# Altium PCB landslide_gateway.PcbDoc
Units mm, origin at the board's own origin, x right, y up, seen from the top; angles counter-clockwise.
Board outline 100 x 100 mm, 2 copper layers (Top Layer, Bottom Layer), stack 1.571 mm thick; 82 components, 60 nets, 314 pads, 222 vias.
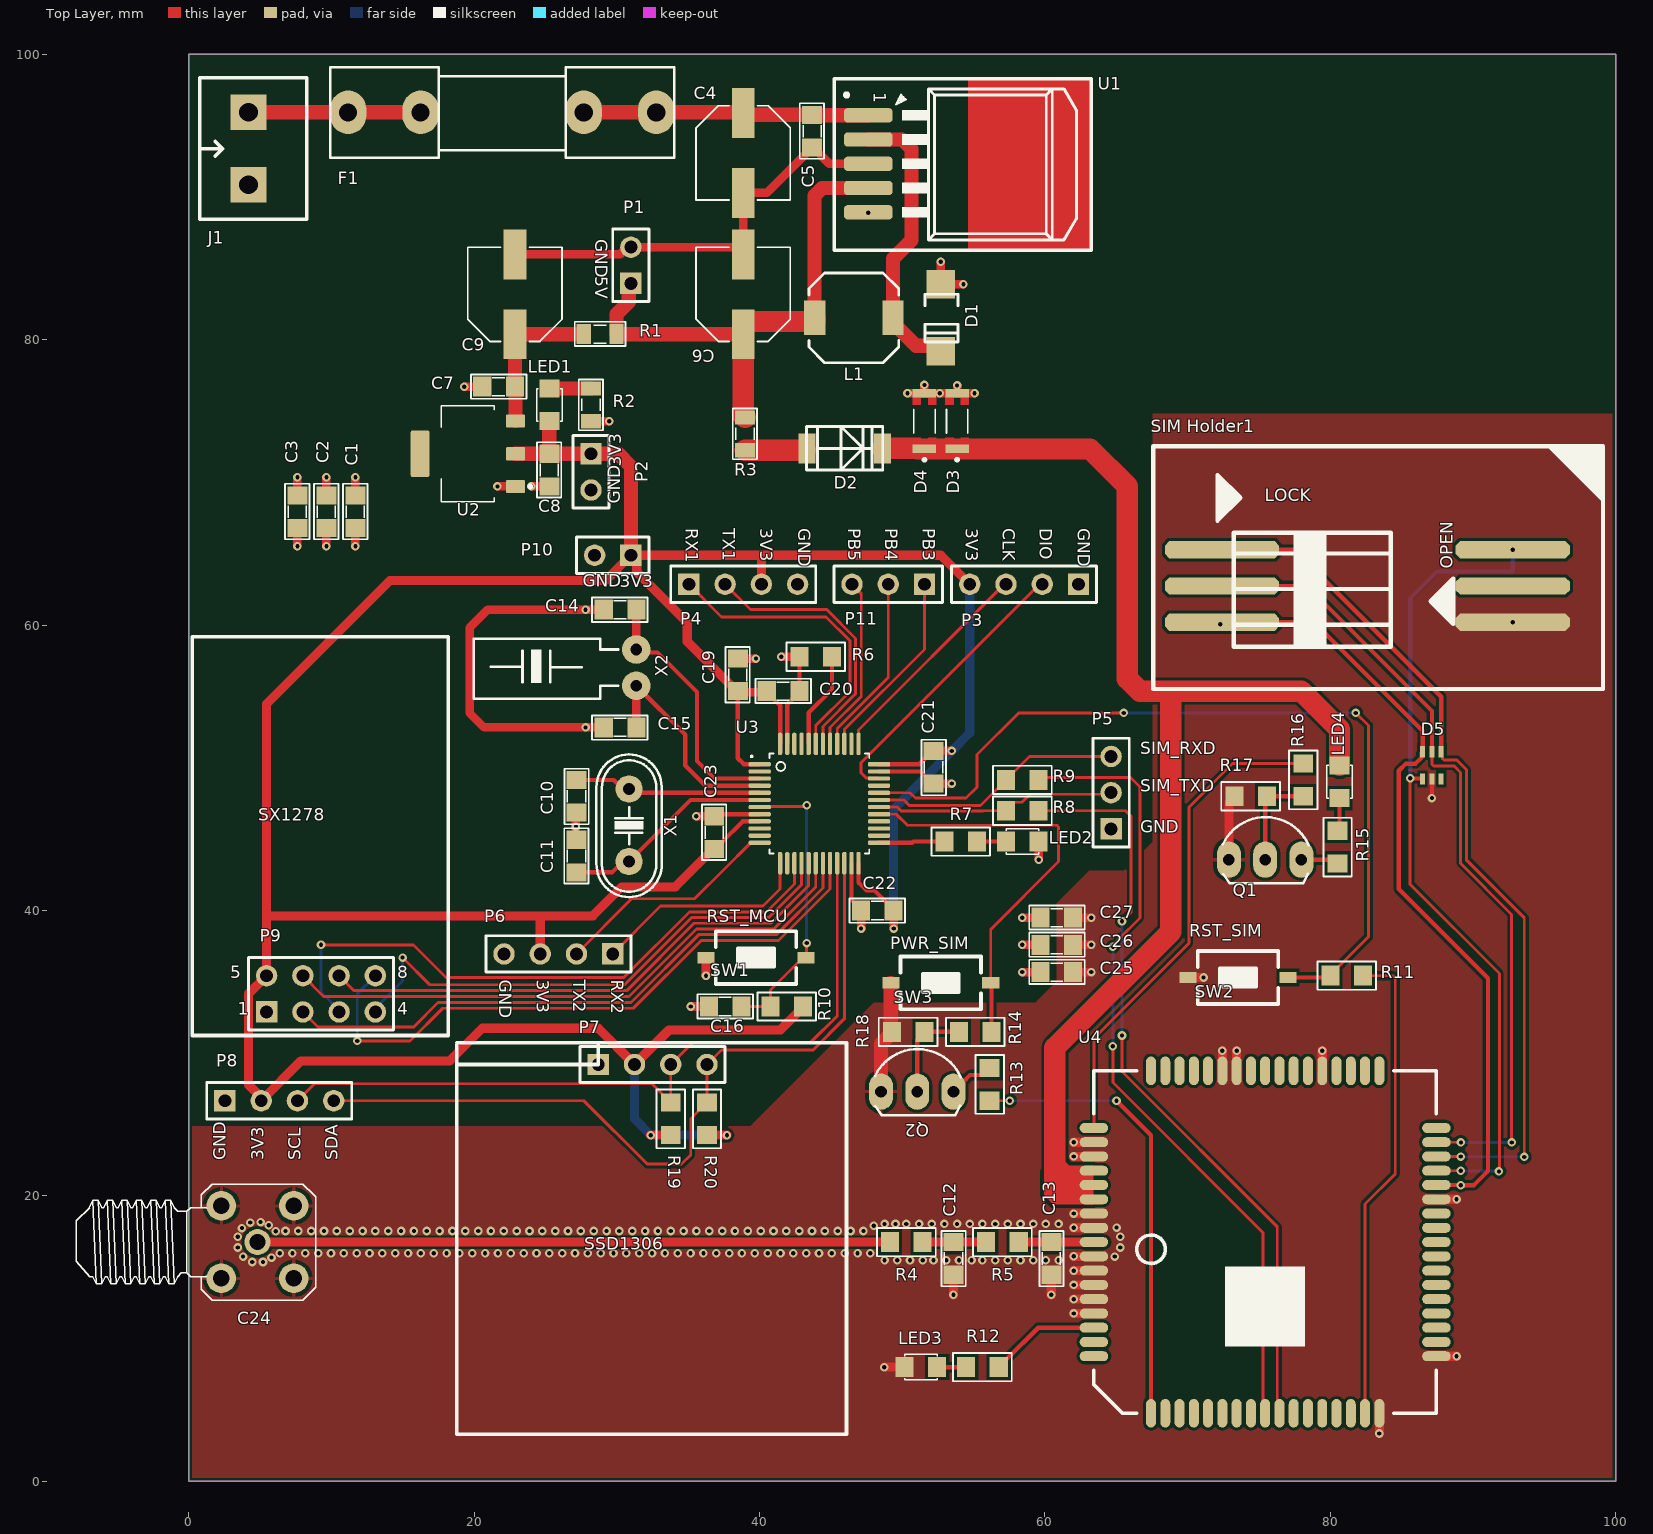
[diagram p0: Top Layer view]
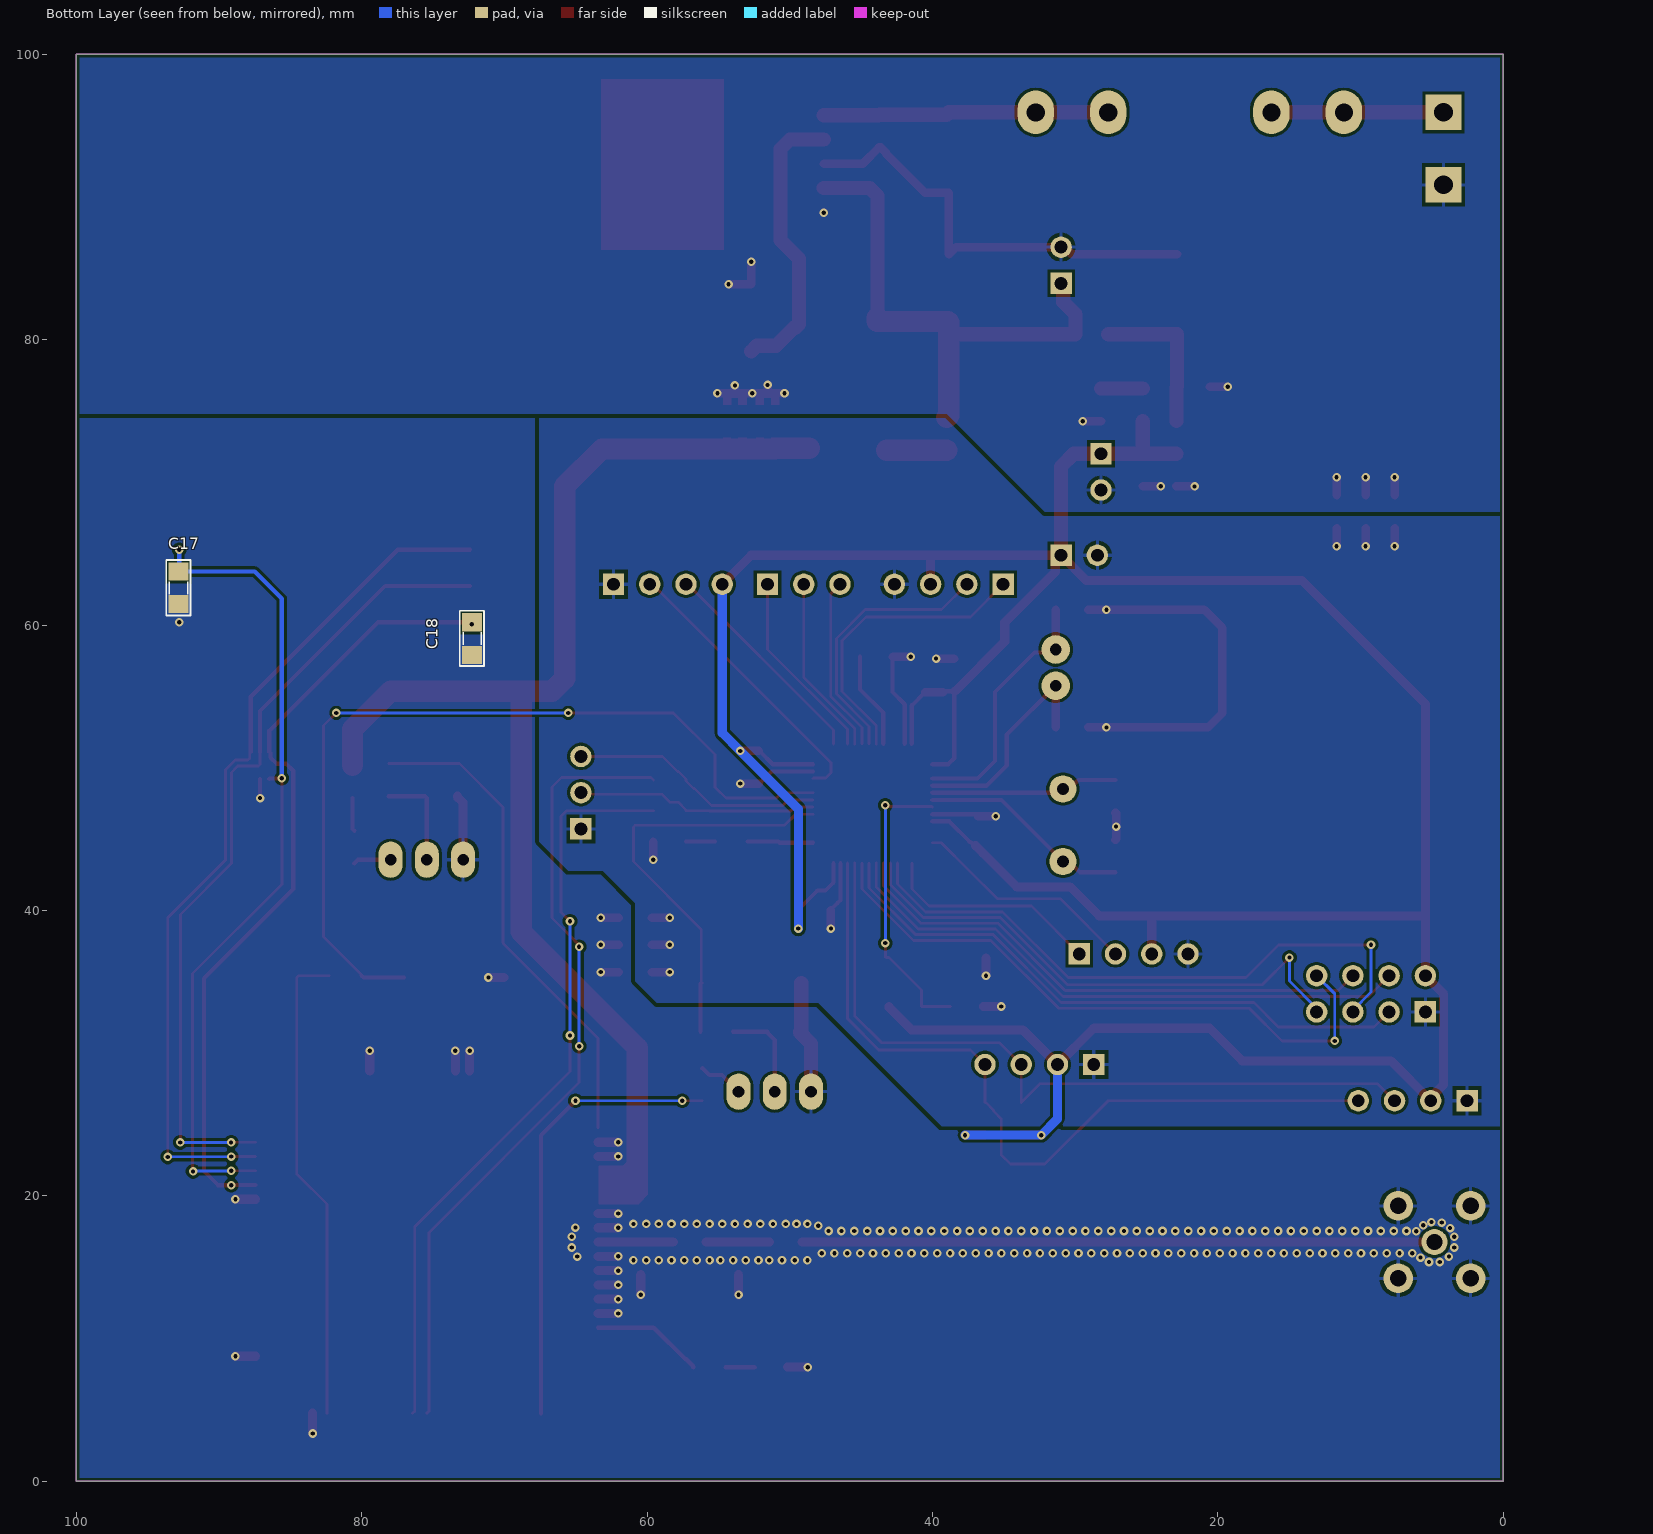
[diagram p1: Bottom Layer view, seen from below]

## Layer stack, top to bottom
Top Solder: solder mask 0.0102, Solder Resist, Dk 3.5
Top Layer: signal copper 0.0356
Dielectric 1: dielectric 1.5, FR-4, Dk 4.8
Bottom Layer: signal copper 0.0356
Bottom Solder: solder mask 0.0102, Solder Resist, Dk 3.5

## Board outline
0,0 0,100 100,100 100,0

## Design rules (kind name [scope] priority, off if disabled: settings)
AssemblyTestPointUsage [All] p1 off:
AssemblyTestpoint [All] p1 off: testpointundercomponent=TRUE minsize=1.016 maxsize=2.54 preferedsize=1.524 minholesize=0 maxholesize=1.016 preferedholesize=0.813 testpointgrid=0.025 usegrid=TRUE gridtolerance=0 allowsidetop=TRUE allowsidebottom=TRUE
Clearance RF [InNetClass('50R_ANT')] p1: gap=0.2 ignorepadtopadclearanceinfootprint=FALSE except(0: Arc-Hole Track-Hole SMDPad-Hole THPad-Hole Via-Hole Fill-Hole Poly-Hole Region-Hole Text-Hole; 0.13: Arc-Via Arc-Fill Arc-Poly Arc-Region Track-Via Track-Fill Track-Poly Track-Region)
Clearance [All] p2: gap=0.2 ignorepadtopadclearanceinfootprint=FALSE except(0: Arc-Hole Track-Hole SMDPad-Hole THPad-Hole Via-Hole Fill-Hole Poly-Hole Region-Hole Text-Hole; 0.3: Fill-Fill Fill-Poly Fill-Region Poly-Poly Poly-Region Region-Region)
FabricationTestPointUsage [All] p1 off: valid=0 allowmultiple=FALSE
FabricationTestpoint [All] p1 off: side=3 testpointundercomponent=TRUE minsize=1.016 maxsize=2.54 preferedsize=1.524 minholesize=0 maxholesize=1.016 preferedholesize=0.813 testpointgrid=0.025 allowsidetop=TRUE allowsidebottom=TRUE usegrid=TRUE gridtolerance=0
MinimumSolderMaskSliver [All] p1: minsoldermaskwidth=0
PolygonConnect [All] p1: thpad.connectstyle=Relief thpad.reliefconductorwidth=0.254 thpad.reliefentries=4 thpad.polygonreliefangle="90 Angle" thpad.airgapwidth=0.254 smdpad.connectstyle=Direct smdpad.reliefconductorwidth=0.254 smdpad.reliefentries=4 smdpad.polygonreliefangle="90 Angle" smdpad.airgapwidth=0.254 via.connectstyle=Direct via.reliefconductorwidth=0.254 via.reliefentries=4 via.polygonreliefangle="90 Angle" via.airgapwidth=0.254
RoutingVias [All] p1: holewidth=0.3 width=0.6 viastyle="Through Hole" minholewidth=0.3 minwidth=0.6 maxholewidth=0.3 maxwidth=0.6
SilkToSilkClearance [All] p1: silktosilkclearance=0
SilkToSolderMaskClearance [IsPad] p1: minsilkscreentomaskgap=0 clearancetoexposedcopper=TRUE
SolderMaskExpansion [All] p1: expansion=0.102 istentingtop=FALSE
Width RF_width [InNetClass('50R_ANT')] p1: maxlimit=0.642 minlimit=0.642 preferedwidth=0.642 impedanceprofiledriven=TRUE impedanceprofileid={82C3FFAF-1901-45A9-A1B3-9F420BA7F2EB} impedanceprofilevalue=50.000000 minimp=50.000000 maximp=50.000000 favimp=50.000000
Width [All] p2: maxlimit=3 minlimit=0.2 preferedwidth=0.3
23 further rules are at their usual default settings.

## Classes and differential pairs
net class RF: GSM_ANT NetC12_2 NetC13_2
net class POWER: +3V3 +5 GND GND_MCU GND_SIM NetC7_1 NetD1_2 NetF1_1 VGSM Vin
net class 50R_ANT: GSM_ANT NetC12_2 NetC13_2
component class power_gateway: C1 C2 C3 C4 C5 C6 C7 C8 C9 D1 D2 D3 D4 F1 J1 L1 LED1 P1 P2 R1 R2 R3 U1 U2
component class mcu_gateway: C10 C11 C12 C13 C14 C15 C16 C17 C18 C19 C20 C21 C22 C23 C24 C25 C26 C27 D5 LED2 LED3 LED4 P3 P4 P5 P6 P7 P8 P9 P10 P11 Q1 Q2 R4 R5 R6 R7 R8 R9 R10 R11 R12 R13 R14 R15 R16 R17 R18 R19 R20 "SIM Holder1" SW1 SW2 SW3 U3 U4 X1 X2

## Components (designator, comment, footprint, x,y, rotation, side; value= is the part's Value field where it differs from the comment)
C1 "104" SM-0805 11.684,67.945 r270 top value=103
C2 "104" SM-0805 9.652,67.945 r270 top value=103
C3 "104" SM-0805 7.62,67.945 r270 top value=103
C4 "100uH/25V" CAP-ALU-SMD-6.3x7.7x2.2 38.862,93.091 r270 top
C5 "104" SM-0805 43.688,94.615 r270 top value=103
C6 "470uf/16V" CAP-ALU-SMD-6.3x7.7x2.2 38.862,83.185 r90 top
C7 "103" SM-0805 21.717,76.708 r180 top
C8 "103" SM-0805 25.273,70.866 r270 top
C9 "100uH/16V" CAP-ALU-SMD-6.3x7.7x2.2 22.86,83.185 r90 top
C10 "22pF" SM-0805 27.178,48.006 r90 top value=103
C11 "22pF" SM-0805 27.178,43.815 r270 top value=103
C12 "104" SM-0805 53.594,15.621 r90 top value=103
C13 "104" SM-0805 60.452,15.621 r90 top value=103
C14 "22pF" SM-0805 30.226,61.087 r0 top value=103
C15 "22pF" SM-0805 30.226,52.832 r0 top value=103
C16 "104" SM-0805 37.592,33.274 r180 top value=103
C17 "104" SM-0805 92.837,62.611 r270 bottom value=103
C18 "22pF" SM-0805 72.263,59.055 r270 bottom value=103
C19 "104" SM-0805 38.481,56.515 r270 top value=103
C20 "104" SM-0805 41.656,55.372 r180 top value=103
C21 "475" SM-0805 52.197,50.038 r90 top value=103
C22 "103" SM-0805 48.26,40.005 r0 top
C23 "105" SM-0805 36.83,45.466 r270 top value=103
C24 "210111003" SMA-RA 4.826,16.764 r270 top
C25 "104" SM-0805 60.833,35.687 r180 top value=103
C26 "104" SM-0805 60.833,37.592 r180 top value=103
C27 "104" SM-0805 60.833,39.497 r180 top value=103
D1 "1N5822" Diode_SS34 52.705,81.534 r270 top
D2 "" 1N4007_SMD 45.974,72.39 r0 top
D3 "TZM4V3" DIO_LL4148 53.848,74.295 r90 top
D4 "TZM4V3" DIO_LL4148 51.562,74.295 r90 top
D5 "SMF05C" SC70-6 87.122,50.165 r0 top
F1 "F2A" FUSE2 21.971,95.936 r0 top value=Fuse
J1 "KF2" KF2-5.08 4.191,93.396 r90 top
L1 "Inductor" inductor_smd 46.609,81.534 r180 top value=100uH
LED1 "LED" LED-0805-Green 25.273,74.295 r90 top value="LED 3 - 5 ly 2 Colour"
LED2 "LED" LED-0805-Green 57.277,44.831 r0 top value="LED 3 - 5 ly 2 Colour"
LED3 "LED" LED-0805-Green 52.451,8.001 r180 top value="LED 3 - 5 ly 2 Colour"
LED4 "LED" LED-0805-Green 80.645,50.165 r270 top value="LED 3 - 5 ly 2 Colour"
P1 "Header 2" HDR1X2 30.988,83.947 r90 top
P2 "Header 2" HDR1X2 28.194,72.009 r270 top
P3 "Header 4" "HDR 1X4" 62.357,62.865 r180 top
P4 "Header 4" HDR1X4 35.052,62.865 r0 top
P5 "Header 3" HDR1X3 64.643,45.72 r90 top
P6 "Header 4" HDR1X4 29.718,36.957 r180 top
P7 "Header 4" HDR1X4 28.702,29.21 r0 top
P8 "SSD1306" "HDR 1X4" 2.54,26.67 r0 top
P9 "LORA_SX1278" HDR2X4_CEN 5.461,32.893 r0 top
P10 "Header 2" HDR1X2 30.988,64.897 r180 top
P11 "Header 3" HDR1X3 51.562,62.865 r180 top
Q1 "2N222" TO92-123 75.438,43.561 r0 top value=C1815
Q2 "2N222" TO92-123 51.054,27.305 r0 top value=C1815
R1 "0R" RES-SMD-0805 28.829,80.391 r180 top
R2 "100R" RES-SMD-0805 28.194,75.438 r270 top
R3 "0R" RES-SMD-0805 38.989,73.406 r270 top
R4 "47R" R-0805 50.292,16.764 r0 top value=1k
R5 "47R" R-0805 57.023,16.764 r0 top value=1k
R6 "4k7" R-0805 43.942,57.785 r180 top value=1k
R7 "47R" R-0805 54.102,44.831 r180 top value=1k
R8 "47R" R-0805 58.42,49.149 r180 top value=1k
R9 "47R" R-0805 58.42,46.99 r180 top value=1k
R10 "4k7" R-0805 41.91,33.274 r0 top value=1k
R11 "100k" R-0805 81.153,35.433 r0 top value=1k
R12 "47R" R-0805 55.626,8.001 r0 top value=1k
R13 "1k" R-0805 56.134,27.813 r270 top
R14 "4k7" R-0805 55.118,31.496 r0 top value=1k
R15 "300" R-0805 80.518,44.45 r90 top value=1k
R16 "4k7" R-0805 78.105,49.149 r90 top value=1k
R17 "47k" R-0805 74.422,48.006 r180 top value=1k
R18 "47k" R-0805 50.419,31.496 r180 top value=1k
R19 "4k7" R-0805 33.782,25.4 r90 top value=1k
R20 "4k7" R-0805 36.322,25.4 r90 top value=1k
"SIM Holder1" "SIMCARD6PIN" SIMCARD6pin 82.55,62.738 r180 top
SW1 "RESET MCU" SW1-SMD 39.751,36.703 r180 top value="SW chip 2 pin"
SW2 "RESET SIM" SW1-SMD 73.533,35.306 r180 top value="SW chip 2 pin"
SW3 "PWR SIM" SW1-SMD 52.705,34.925 r0 top value="SW chip 2 pin"
U1 "LM2576" TO263 53.594,92.71 r270 top
U2 "AMS1117-3.3" SOT229P700X180-4N 19.558,72.009 r90 top
U3 "STM32F030CCT6" QFP50P900X900X160-48N 44.196,47.498 r0 top
U4 "SIM900" SIM900 75.438,16.764 r90 top locked
X1 "8Mhz" XT2 30.861,45.974 r90 top value=4Mhz
X2 "32,768 Khz" XT32k 31.369,55.753 r180 top value=32,768khz

## Footprints (in the part's own frame and the unit in brackets; to place one, negate y for a bottom-side part, rotate by r counter-clockwise, add the part's x,y. Pads: shape width x height; smd on the part's side, far side on the other; paste and mask are expansions set on the pad)
1N4007_SMD [mm]
  rect 1.2x2.1 smd: 1(-2.65,0) 2(2.65,0)
  silkscreen extent -2.67,-1.52 2.67,1.52, body extent -2.65,-1.8 2.65,1.8, height 2.4
CAP-ALU-SMD-6.3x7.7x2.2 [mm]
  rect 3.5x1.6 smd: 1(-2.8,0) 2(2.8,0)
  silkscreen extent -3.3,-3.3 3.3,3.3, body extent -3.65,-3.3 3.65,3.3, height 7.65
DIO_LL4148 [mm]
  rect 0.6x1.65 smd: A(1.95,0) C(-1.95,0)
  Top Layer region: -1.15,0.25 -1.65,0.25 -1.65,-0.25 -1.15,-0.25 -1.15,-0.825 -2.24,-0.825 -2.24,0.825 -1.15,0.825
  Top Layer region: 2.25,-0.825 1.15,-0.825 1.15,-0.25 1.65,-0.25 1.65,0.25 1.15,0.25 1.15,0.825 2.25,0.825
  silkscreen extent -2.8,-0.75 0.83,0.75
Diode_SS34 [mm]
  rect 2x2 smd: 1(-2.35,0) 2(2.35,0)
  silkscreen extent -1.65,-1.1 1.7,1.2, body extent -2.57,-1.82 2.73,1.78, height 2.4
FUSE2 [mil] "De Fuse"
  oval 100x120 hole 50: 1(-425,0) 1(-225,0) 2(225,0) 2(425,0)
  silkscreen extent -475,-125 475,125, body extent -448,-117 459,127, height 378
HDR1X2 [mm] "Connector; Header; 2 Position"
  rect 1.5x1.5 hole 0.9: 1(0,0)
  round 1.5 hole 0.9: 2(2.54,0)
  silkscreen extent -1.27,-1.27 3.81,1.27, body extent -1.27,-1.27 3.81,1.27, height 7
HDR1X3 [mm] "Connector; Header; 3 Position"
  rect 1.5x1.5 hole 0.9: 1(0,0)
  round 1.5 hole 0.9: 2(2.54,0) 3(5.08,0)
  silkscreen extent -1.27,-1.27 6.35,1.27, body extent -1.27,-1.27 6.35,1.27, height 7
HDR1X4 [mm] "Connector; Header; 4 Position"
  rect 1.5x1.5 hole 0.9: 1(0,0)
  round 1.5 hole 0.9: 2(2.54,0) 3(5.08,0) 4(7.62,0)
  silkscreen extent -1.27,-1.27 8.89,1.27, body extent -1.27,-1.27 8.89,1.27, height 7
HDR2X4_CEN [mm] "Connector; Header; 4x2 Position"
  rect 1.5x1.5 hole 0.9: 1(0,0)
  round 1.5 hole 0.9: 2(2.54,0) 3(5.08,0) 4(7.62,0) 5(0,2.54) 6(2.54,2.54) 7(5.08,2.54) 8(7.62,2.54)
  silkscreen extent -1.27,-1.27 8.89,3.81, body extent -1.27,-1.27 8.89,3.81, height 7
"HDR 1X4" [mm] "Connector; Header; 4 Position"
  rect 1.5x1.5 hole 0.9: 1(0,0)
  round 1.5 hole 0.9: 2(2.54,0) 3(5.08,0) 4(7.62,0)
  silkscreen extent -1.27,-1.27 8.89,1.27, body extent -1.26,-1.27 8.89,1.26, height 8.51
inductor_smd [mm] "SM Inductor; 2 Leads; Body 6.3x6.3mm (LxW)"
  rect 1.5x2.4 smd: 1(-2.75,0) 2(2.75,0)
  silkscreen extent -3.15,-3.15 3.15,3.15, body extent -3.65,-3.65 3.65,3.65, height 4
KF2-5.08 [mm]
  rect 2.5x2.5 hole 1.3: 1(-2.54,0) 2(2.54,0)
  silkscreen extent -4.95,-4.08 4.95,3.43, body extent -5,-4.07 5,3.43, height 10
LED-0805-Green [mil]
  rect 50x55 smd: 1(0,0) 2(90,0)
  silkscreen extent 0,-35 90,35, body extent 5,-25 85,25, height 43
QFP50P900X900X160-48N [mm]
  rrect70% 1.56x0.3 smd: 1(-4.18,2.75) 2(-4.18,2.25) 3(-4.18,1.75) 4(-4.18,1.25) 5(-4.18,0.75) 6(-4.18,0.25) 7(-4.18,-0.25) 8(-4.18,-0.75) 9(-4.18,-1.25) 10(-4.18,-1.75) 11(-4.18,-2.25) 12(-4.18,-2.75) 25(4.18,-2.75) 26(4.18,-2.25) 27(4.18,-1.75) 28(4.18,-1.25) 29(4.18,-0.75) 30(4.18,-0.25) 31(4.18,0.25) 32(4.18,0.75) 33(4.18,1.25) 34(4.18,1.75) 35(4.18,2.25) 36(4.18,2.75)
  rrect70% 0.3x1.56 smd: 13(-2.75,-4.18) 14(-2.25,-4.18) 15(-1.75,-4.18) 16(-1.25,-4.18) 17(-0.75,-4.18) 18(-0.25,-4.18) 19(0.25,-4.18) 20(0.75,-4.18) 21(1.25,-4.18) 22(1.75,-4.18) 23(2.25,-4.18) 24(2.75,-4.18) 37(2.75,4.18) 38(2.25,4.18) 39(1.75,4.18) 40(1.25,4.18) 41(0.75,4.18) 42(0.25,4.18) 43(-0.25,4.18) 44(-0.75,4.18) 45(-1.25,4.18) 46(-1.75,4.18) 47(-2.25,4.18) 48(-2.75,4.18)
  silkscreen extent -4.81,-3.5 3.5,3.5
R-0805 [mil] "Compoment SMD 80x50mil"
  rect 50x55 smd: 1(-45,0) 2(45,0)
  silkscreen extent -81,-39 81,39, body extent -39,-25 39,25, height 31
RES-SMD-0805 [mil]
  rect 39.37x55 smd: 1(-45,0) 2(45,0)
  silkscreen extent -70,-34 70,33, body extent -39,-25 39,25, height 31
SC70-6 [mm]
  rect 0.35x0.8 smd paste-1 mask+0: 1(-0.65,-0.95) 2(0,-0.95) 3(0.65,-0.95) 4(0.65,0.95) 5(0,0.95) 6(-0.65,0.95)
SIM900 [mm]
  oval 2x0.7 smd: 1(-12,8) 2(-12,7) 3(-12,6) 4(-12,5) 5(-12,4) 6(-12,3) 7(-12,2) 8(-12,1) 9(-12,0) 10(-12,-1) 11(-12,-2) 12(-12,-3) 13(-12,-4) 14(-12,-5) 15(-12,-6) 16(-12,-7) 17(-12,-8) 35(12,-8) 36(12,-7) 37(12,-6) 38(12,-5) 39(12,-4) 40(12,-3) 41(12,-2) 42(12,-1) 43(12,0) 44(12,1) 45(12,2) 46(12,3) 47(12,4) 48(12,5) 49(12,6) 50(12,7) 51(12,8)
  oval 0.7x2 smd: 18(-8,-12) 19(-7,-12) 20(-6,-12) 21(-5,-12) 22(-4,-12) 23(-3,-12) 24(-2,-12) 25(-1,-12) 26(0,-12) 27(1,-12) 28(2,-12) 29(3,-12) 30(4,-12) 31(5,-12) 32(6,-12) 33(7,-12) 34(8,-12) 52(8,12) 53(7,12) 54(6,12) 55(5,12) 56(4,12) 57(3,12) 58(2,12) 59(1,12) 60(0,12) 61(-1,12) 62(-2,12) 63(-3,12) 64(-4,12) 65(-5,12) 66(-6,12) 67(-7,12) 68(-8,12)
  silkscreen extent -12,-12 12,12, body extent -12,-12 12,12, height 3.02
SIMCARD6pin [mm]
  oct 8x1.2 smd: 1(10.138,2.54) 2(10.138,0) 3(10.138,-2.54) 4(-10.238,2.54) 5(-10.238,0) 6(-10.238,-2.54)
  silkscreen extent -16.56,-9.79 14.96,7.21, body extent -16.63,-9.87 13.07,7.33, height 2.35
SM-0805 [mil] "Compoment SMD 80x50mil"
  rect 50x55 smd: 1(-45,0) 2(45,0)
  silkscreen extent -77,-34 76,33, body extent -40,-27 40,23, height 24
SMA-RA [mil]
  round 72 hole 45: 1(0,0)
  round 82 hole 45: 2(-100,-100) 3(100,-100) 4(100,100) 5(-100,100)
  silkscreen extent -160,-500 160,160, body extent -137,-457 139,137, height 394
SOT229P700X180-4N [mm]
  rrect15% 0.93x1.31 smd: 1(-2.29,-3.345) 2(0,-3.345) 3(2.29,-3.345)
  rrect15% 3.24x1.31 smd: 4(0,3.345)
  silkscreen extent -3.36,-4.47 3.36,1.86
SW1-SMD [mm]
  rect 1.2x0.8 smd: 1(-3.5,0) 2(3.5,0)
  silkscreen extent -2.82,-1.85 2.82,1.85, body extent -3.05,-1.85 3.05,1.85, height 2.5
TO92-123 [mil] "TO-92"
  oval 66x100 hole 32: 1(-100,0) 2(0,0) 3(100,0)
  silkscreen extent -117,-65 120,118, body extent -109,-66 109,95, height 245
TO263 [mm]
  rrect50% 1x3.4 smd: 1(-3.019,-5.969) 2(-1.319,-5.969) 4(2.081,-5.969) 5(3.781,-5.969)
  rrect50% 1x3.4 smd mask+0: 3(0.381,-5.969)
  Top Layer region: -5.568,1.016 6.432,1.016 6.432,9.65 -5.568,9.65
  silkscreen extent -5.57,-8.35 6.43,9.65, body extent -4.73,-6.84 5.43,7.8, height 4.57
XT2 [mil] "Footpin for Crystal 2 pin"
  round 75 hole 34: 1(-100,0) 2(100,0)
  silkscreen extent -198,-90 195,90, body extent -233,-93 213,90, height 138
XT32k [mm] "Crystal 32k, 2 pin, real timer for DS1307"
  round 2 hole 0.813: 1(0,0) 2(0,-2.54)
  silkscreen extent 1.27,-3.3 11.4,0.91

## Part data
C1 C2 C3 C5 C7 C8 C10 C11 C12 C13 C14 C15 C16 C17 C18 C19 C20 C21 C22 C23 C25 C26 C27: library part CM, "Cap SMD"
C4 C6 C9: library part CN-ALU-SMD, "Polarized Capacitor (Axial)", LatestRevisionDate=17-Jul-2002, LatestRevisionNote="Re-released for DXP Platform.", PackageReference=POLAR0.8, Published=8-Jun-2000, Publisher="Altium Limited"
C24: library part "CON Ant", "CONNECTOR ANTEN", Manufacturer="Würth Elektronik eiSos GmbH", ComponentLink1Description=Manufacturer, ComponentLink1URL=http://www.we-online.de, ComponentLink2Description=Datasheet, ComponentLink2URL=http://katalog.we-online.de/kataloge/eisos/index.php?language=en&pf=Filter_gerade, Created by="Christin Zierenner", Created Date="May 2012", partNo=210111003
D1: library part 1N5819, "Schottky diode"
D2: library part diode, "diode"
D3 D4: library part LL4148, "Diode Standard 100V 200mA Surface Mount SOD-80", Package="SOD-80 Taitron", Availability=Unavailable, MF="ON Semiconductor", MP=LL4148, Price=None, SnapEDA_Link=https://www.snapeda.com/parts/LL4148/ON%20Semiconductor/view-part/2182678/?ref=snap
D5: "12.5V Clamp 8A _8/20Âµs_ Ipp Tvs Diode Surface Mount SC-88/SC70-6/SOT-363", Package="SOT-363 ON Semiconductor", Availability=Unavailable, MF="ON Semiconductor", MP=SMF05C, Price=None, SnapEDA_Link=https://www.snapeda.com/parts/SMF05C/ON%20Semiconductor/view-part/2782704/?ref=snap
F1: library part Fuse, "Fuse", Designed by=VanDungEvn
J1: Manufacturer="Würth Elektronik eiSos GmbH", partNo=691103110002, ComponentLink1 Description=Manufacturer, ComponentLink1URL=http://www.we-online.com, ComponentLink2 Description=Datasheet, ComponentLink2URL=http://katalog.we-online.de/em/datasheet/6911031100xx.pdf, Created by="Karrer Zheng", Created Date="29 October 2013", NoPins=2
LED1 LED2 LED3 LED4: library part "LED SMD"
P1 P2 P10: "Header, 2-Pin", LatestRevisionDate=17-Jul-2002, LatestRevisionNote="Re-released for DXP Platform.", Publisher="Altium Limited"
P3 P4 P6 P7: "Header, 4-Pin"
  P4 P6 P7: LatestRevisionDate=17-Jul-2002, LatestRevisionNote="Re-released for DXP Platform.", Publisher="Altium Limited"
P5 P11: "Header, 3-Pin", LatestRevisionDate=17-Jul-2002, LatestRevisionNote="Re-released for DXP Platform.", Publisher="Altium Limited"
P8: library part "Header 4", "Header, 4-Pin"
P9: library part "Header 4X2A", "Header, 4-Pin, Dual row", LatestRevisionDate=17-Jul-2002, LatestRevisionNote="Re-released for DXP Platform.", Publisher="Altium Limited"
Q1 Q2: "NPN 600mW, ECB", Creat by=MT-TECH.VN
R1 R2 R3: library part Res-SMD, "Resistor", Manufacturer="Generic Components", Class=Passive, Published=08/06/2000, Publisher="Altium Hobart Technology Centre"
R4 R5 R6 R7 R8 R9 R10 R11 R12 R13 R14 R15 R16 R17 R18 R19 R20: library part resistor, "dien tro"
SW1 SW2 SW3: library part SW2, "Switch button 2 pin"
U1: Max Input Voltage="12 V", Max Output Current="3 (6.0 peak) A", Max Output Voltage=mV, Temperature Range="-40 to +125 degC", Category=IC-Power, Min Input Voltage=mV, Min Output Voltage=mV, Mounting Technology="Surface Mount", Status=Unreleased, Supply Voltage=mV
U2: "Sot223/Pkg 1-Amp 3.3-Volt Low Drop Out Voltage Regulatator", Package=None, Availability=Unavailable, MF="Advanced Monolithic Systems", MP=AMS1117-3.3, Price=None, SnapEDA_Link=https://www.snapeda.com/parts/AMS1117-3.3/Advanced%20Monolithic%20Systems/view-part/53450/?ref=snap
U3: "ARMÂ® CortexÂ®-M0 STM32F0 Microcontroller IC 32-Bit 48MHz 256KB _256K x 8_ FLASH 48-LQFP _7x7_", Package="LQFP-48 STMicroelectronics", Digi-Key_Part_Number=497-17332-2-ND, Digi-Key_Purchase_URL=https://www.digikey.com.ar/product-detail/en/stmicroelectronics/STM32F030CCT6TR/497-17332-2-ND/6833532?utm_source=snapeda&utm_medium=aggregator&utm_campaign=symbol, MF=STMicroelectronics, MP=STM32F030CCT6, SnapEDA_Link=https://www.snapeda.com/parts/STM32F030CCT6/STMicroelectronics/view-part/447161/?ref=snap
X1: library part XT2, "Crystal For all Crystal 2pin."
X2: library part XT32k, "Crystal 32,768kHz for timer real"
L1: Published=8-Jun-2000, Publisher="Altium Limited", Revision="July-2002: Re-released for DXP Platform."

## Via types
v1: diameter 0.6, hole 0.3, Top Layer to Bottom Layer, tented both sides, 222 vias

## Nets (pads, with @x,y where several pads share a name; then routed paths per layer and width w, separated by ;. In a path a pad name is that pad's centre, name@x,y a point inside that pad or via, vN(x,y) a via of type N, cw(c..) or ccw(c..) an arc to the next point about the centre after c; other vN are vias at no path point)
+3V3: C8.1 C19.2 C20.2 C21.2 C22.2 C23.2 LED1.1 P2.1 P3.4 P4.3 P6.3 P7.2 P8.2 P9.5 P10.1 R10.2 R19.1 R20.1 U2.2 U3.1 U3.9 U3.24 U3.36 U3.48 | length 263
  Top Layer w0.3: C23.2 37.315,44.808 37.384,44.808 38.824,46.248 U3.9 ; U3.1 38.906,50.248 38.481,50.673 C19.2 C20.2 40.513,55.308 41.446,54.375 U3.48 ; U3.24 46.946,41.954 47.498,41.402 48.069,41.402 49.403,40.069 C22.2 ; U3.36 51.2,50.248 52.133,51.181 C21.2
  Top Layer w0.6: C19.2@38.417,55.372 C19.2 ; 39.243,55.308 C20.2@40.513,55.308 ; v1(49.403,38.735) C22.2 ; C21.2 v1(53.467,51.181)
  Top Layer w0.642: P6.3 24.638,39.624 ; v1(32.385,24.257) R19.1 ; R20.1 v1(37.719,24.257) ; C23.2@36.979,44.538 36.979,44.536 36.452,44.009 36.45,44.009 34.097,41.656 30.353,41.656 28.321,39.624 24.638,39.624 ; C19.2@38.417,55.372 34.939,58.85 34.939,60.184 31.396,63.727 31.396,64.489 P10.1 ; P4.3 40.132,64.897 ; R10.2 43.053,33.21 41.465,31.623 33.655,31.623 P7.2 28.702,31.75 20.584,31.75 18.298,29.464 7.874,29.464 P8.2 5.08,26.902 4.19,27.792 4.19,34.162 P9.5 5.461,39.624 ; P3.4 52.705,64.897 40.132,64.897 ; 5.461,39.624 24.638,39.624 ; 5.461,39.624 5.461,54.483 14.097,63.119 29.21,63.119 P10.1 ; P10.1 40.132,64.897
  Top Layer w1: U2.2 C8.1 ; LED1.1 C8.1 ; P10.1 30.988,71.12 30.099,72.009 P2.1 C8.1
  Bottom Layer w0.642: P7.2 31.242,25.4 v1(32.385,24.257) v1(37.719,24.257) ; v1(49.403,38.735) 49.403,47.117 v1(53.467,51.181) 54.737,52.451 P3.4
+5: C6.1 L1.2 P1.1 R1.1 R3.1 U1.4 | length 37.3
  Top Layer w1: R1.1 29.976,80.395 29.976,81.792 30.832,82.648 30.832,83.791 P1.1 ; R1.1@30.14,80.417 30.172,80.385 C6.1 ; L1.2 43.859,90.085 44.403,90.629 U1.4
  Top Layer w1.5: R3.1 38.862,74.676 C6.1 38.862,81.23 38.912,81.28 43.859,81.28 L1.2
GND: C1.1 C2.1 C3.1 C4.2 C5.2 C6.2 C7.2 C8.2 C9.2 D1.1 D3.A D4.A J1.1 P1.2 P2.2 R2.2 U1.3 U1.5 U2.1 | length 49.2
  Top Layer w0.6: C3.1 v1(7.62,70.358) ; C2.1 v1(9.652,70.358) ; C1.1 v1(11.684,70.358) ; v1(19.304,76.708) C7.2 ; v1(21.633,69.719) U2.1 ; C9.2 30.242,85.985 30.744,86.487 P1.2 38.362,86.487 C6.2@38.862,85.987 ; v1(24.003,69.723) C8.2 ; R2.2 v1(29.464,74.295) ; C6.2 C6.2@38.862,85.987 ; v1(47.625,88.9) U1.5 ; U1.3 44.895,92.329 43.752,93.472 C5.2 43.624,93.472 43.289,93.137 43.289,93.073 40.507,90.291 C4.2 C6.2@38.862,85.987 ; v1(50.374,76.245) D4.A ; v1(51.562,76.835) D4.A ; v1(52.705,85.471) D1.1 v1(54.293,83.884) ; v1(53.848,76.795) D3.A ; v1(55.073,76.245) D3.A ; D4.A v1(52.637,76.245) D3.A
GND_MCU: C1.2 C2.2 C3.2 C10.1 C11.1 C14.1 C15.1 C16.2 C19.1 C20.1 C21.1 C22.1 C23.1 C25.2 C26.2 C27.2 LED2.2 P3.1 P4.4 P5.1 P6.4 P7.1 P8.1 P9.1 P10.2 R6.2 SW1.2 U3.8 U3.23 U3.35 U3.47 | length 62.8
  Top Layer w0.3: C23.1@36.842,46.748 U3.8 ; U3.47 41.946,54.455 42.799,55.308 C20.1 R6.2 ; U3.23 46.446,40.729 46.622,40.554 46.632,40.554 47.117,40.069 C22.1 ; U3.35 51.28,49.748 52.133,48.895 C21.1
  Top Layer w0.6: v1(7.62,65.532) C3.2 ; v1(9.652,65.532) C2.2 ; v1(11.684,65.532) C1.2 ; C11.1 27.138,44.998 27.138,46.823 C10.1 ; C15.1 v1(27.813,52.832) 20.701,52.832 19.685,53.848 19.685,59.817 20.955,61.087 v1(27.813,61.087) C14.1 ; v1(35.179,33.274) C16.2 ; v1(35.56,46.609) C23.1 ; v1(36.251,35.433) SW1.2 ; C19.1 v1(39.751,57.658) ; v1(41.529,57.785) R6.2 ; v1(47.117,38.735) C22.1 ; C21.1 v1(53.467,48.895) ; v1(58.42,35.687) C25.2 ; v1(58.42,37.592) C26.2 ; v1(58.42,39.497) C27.2 ; v1(59.563,43.561) LED2.2
  other v1: 27.138,45.881
GND_SIM: "SIM Holder1.4" C12.1 C13.1 C17.2 C18.2 C24.2 C24.3 C24.4 C24.5 C25.1 C26.1 C27.1 D5.2 LED3.2 Q1.1 Q2.1 R17.2 R18.2 SW2.2 SW3.1 U4.17 U4.18 U4.29 U4.39 U4.45 U4.46 U4.53 U4.54 U4.58 U4.59 U4.61 U4.62 U4.63 U4.64 U4.65 | length 44.3
  Top Layer w0.3: v1(87.122,47.879) D5.2
  Top Layer w0.6: C25.1 v1(63.246,35.687) ; C26.1 v1(63.246,37.592) ; C27.1 v1(63.246,39.497)
  Top Layer w0.642: v1(48.751,8.001) LED3.2 ; v1(53.594,13.064) C12.1 ; v1(60.452,13.064) C13.1 ; v1(62.024,11.764) U4.65 ; v1(62.024,12.764) U4.64 ; v1(62.024,13.764) U4.63 ; v1(62.024,14.764) U4.62 ; v1(62.024,15.764) U4.61 ; v1(62.024,17.764) U4.59 ; v1(62.024,18.764) U4.58 ; v1(62.024,22.764) U4.54 ; v1(62.024,23.764) U4.53 ; SW2.2 v1(71.12,35.306) ; U4.46 v1(72.438,30.178) ; Q1.1 72.898,47.561 73.279,47.942 R17.2 ; U4.45 v1(73.438,30.178) ; U4.39 v1(79.438,30.178) ; v1(83.438,3.35) U4.17 ; U4.18 v1(88.852,8.764) ; U4.29 v1(88.852,19.764)
  Top Layer w1: Q2.1 48.514,30.67 49.276,31.432 R18.2 49.205,31.567 SW3.1
  other v1: 4.445,15.367 5.207,15.367 48.768,15.494 49.657,15.494 50.546,15.494 51.435,15.494 52.197,15.494 53.086,15.494 53.975,15.494 54.864,15.494 55.626,15.494 56.515,15.494 57.404,15.494 58.293,15.494 59.182,15.494 60.071,15.494 60.96,15.494 5.803,15.678 3.81,15.748 64.897,15.748 6.372,15.988 7.272,15.988 8.172,15.988 9.072,15.988 9.972,15.988 10.872,15.988 11.772,15.988 12.672,15.988 13.572,15.988 14.472,15.988 15.372,15.988 16.272,15.988 17.172,15.988 18.072,15.988 18.972,15.988 19.872,15.988 20.772,15.988 21.672,15.988 22.572,15.988 23.472,15.988 24.372,15.988 25.272,15.988 26.172,15.988 27.072,15.988 27.972,15.988 28.872,15.988 29.772,15.988 30.672,15.988 31.572,15.988 32.472,15.988 33.372,15.988 34.272,15.988 35.172,15.988 36.072,15.988 36.972,15.988 37.872,15.988 38.772,15.988 39.672,15.988 40.572,15.988 41.472,15.988 42.372,15.988 43.272,15.988 44.172,15.988 45.072,15.988 45.972,15.988 46.872,15.988 47.772,15.988 3.429,16.383 65.278,16.383 3.429,17.145 65.278,17.145 6.096,17.526 6.782,17.54 7.682,17.54 8.582,17.54 9.482,17.54 10.382,17.54 11.282,17.54 12.182,17.54 13.082,17.54 13.982,17.54 14.882,17.54 15.782,17.54 16.682,17.54 17.582,17.54 18.482,17.54 19.382,17.54 20.282,17.54 21.182,17.54 22.082,17.54 22.982,17.54 23.882,17.54 24.782,17.54 25.682,17.54 26.582,17.54 27.482,17.54 28.382,17.54 29.282,17.54 30.182,17.54 31.082,17.54 31.982,17.54 32.882,17.54 33.782,17.54 34.682,17.54 35.582,17.54 36.482,17.54 37.382,17.54 38.282,17.54 39.182,17.54 40.082,17.54 40.982,17.54 41.882,17.54 42.782,17.54 43.682,17.54 44.582,17.54 45.482,17.54 46.382,17.54 47.282,17.54 3.729,17.748 65.024,17.78 48.006,17.907 5.615,17.949 48.768,18.034 49.53,18.034 50.292,18.034 51.181,18.034 52.07,18.034 52.959,18.034 53.848,18.034 54.737,18.034 55.626,18.034 56.515,18.034 57.404,18.034 58.293,18.034 59.182,18.034 60.071,18.034 60.96,18.034 4.315,18.131 5.036,18.169 92.788,60.198
GSM_ANT: C24.1 R4.1 | length 44.3
  Top Layer w0.642: C24.1 R4.1
LORA_DIO0: P9.8 U3.20 | length 44.4
  Top Layer w0.2: v1(11.811,30.861) 15.513,30.861 17.799,33.147 31.154,33.147 35.914,37.907 41.336,37.907 44.946,41.517 U3.20
  Bottom Layer w0.2: v1(11.811,30.861) 11.811,34.163 P9.8
LORA_MISO: P9.4 U3.16 | length 37.8
  Top Layer w0.2: v1(14.986,36.703) 16.891,34.798 30.542,34.798 35.251,39.507 40.652,39.507 42.946,41.801 U3.16
  Bottom Layer w0.2: P9.4 13.081,33.154 14.986,35.059 v1(14.986,36.703)
LORA_MOSI: P9.7 U3.17 | length 38
  Top Layer w0.2: P9.7 11.591,34.383 30.693,34.383 35.417,39.107 40.818,39.107 43.446,41.736 U3.17
LORA_NSS: P9.6 U3.18 | length 41.4
  Top Layer w0.2: P9.6 9.451,33.983 30.858,33.983 35.583,38.707 41.005,38.707 43.946,41.648 U3.18
LORA_RST: P9.2 U3.19 | length 42.6
  Top Layer w0.2: P9.2 9.051,31.843 15.771,31.843 17.475,33.547 30.988,33.547 35.748,38.307 41.171,38.307 44.446,41.583 U3.19
LORA_SCK: P9.3 U3.15 | length 43.5
  Top Layer w0.2: v1(9.271,37.592) 15.748,37.592 18.034,35.306 30.484,35.306 35.085,39.907 40.486,39.907 42.446,41.867 U3.15
  Bottom Layer w0.2: v1(9.271,37.592) 9.271,34.28 10.541,33.01 P9.3
MCU_PB3: P11.1 U3.39 | length 13.5
  Top Layer w0.2: U3.39 45.946,52.677 51.562,58.293 P11.1
MCU_PB4: P11.2 U3.40 | length 12.7
  Top Layer w0.2: U3.40 45.45,51.682 45.45,52.758 49.022,56.33 P11.2
MCU_PB5: P11.3 U3.41 | length 12.4
  Top Layer w0.2: U3.41 44.946,52.82 47.135,55.009 47.135,62.199 46.482,62.851 P11.3
MCU_RX1: P4.1 U3.43 | length 21.1
  Top Layer w0.2: P4.1 37.338,60.579 44.656,60.579 46.332,58.903 46.332,55.349 43.946,52.963 U3.43
MCU_RX2: P6.1 U3.13 | length 15.4
  Top Layer w0.2: P6.1 33.068,40.307 40.255,40.307 41.446,41.498 U3.13
MCU_SIMPWR: R14.2 SW3.2 U3.29 | length 29.3
  Top Layer w0.2: U3.29 49.587,46.748 50.361,45.974 60.843,45.974 60.96,45.857 60.96,43.434 56.205,38.679 SW3.2
  Top Layer w0.3: SW3.2 56.261,34.869 R14.2
MCU_TX1: P4.2 U3.42 | length 19.1
  Top Layer w0.2: P4.2 39.37,61.087 44.714,61.087 46.735,59.066 46.735,55.186 44.446,52.897 U3.42
MCU_TX2: P6.2 U3.12 | length 16.1
  Top Layer w0.2: P6.2 31.041,40.82 35.458,40.82 37.475,42.837 39.386,44.748 U3.12
NetC7_1: C7.1 C9.1 R1.2 U2.3 | length 10.9
  Top Layer w1: U2.3 22.903,76.665 C7.1 C9.1 22.868,80.393 23.919,80.393 23.921,80.391 R1.2
NetC12_2: C12.2 R4.2 R5.1 | length 4.4
  Top Layer w0.642: R4.2 C12.2 R5.1
NetC13_2: C13.2 R5.2 U4.60 | length 5.3
  Top Layer w0.642: R5.2 C13.2 U4.60
NetD1_2: D1.2 L1.1 U1.2 | length 20.3
  Top Layer w1: U1.2 49.989,94.029 50.658,93.36 50.658,86.98 49.359,85.681 49.359,81.084 49.609,80.834 49.708,80.834 50.971,79.571 52.318,79.571 D1.2
NetD2_1: D2.1 R3.2 | length 4.4
  Top Layer w1: D2.1@43.224,72.263 43.324,72.363 D2.1
  Top Layer w1.5: R3.2 D2.1@43.224,72.263
NetF1_1: F1.1 J1.2 | length 12.1
  Top Layer w1: J1.2 11.176,95.936 F1.1@16.256,95.936
NetLED1_2: LED1.2 R2.1 | length 2.9
  Top Layer w1: LED1.2 R2.1
NetLED2_1: LED2.1 R7.1 | length 2
  Top Layer w0.3: R7.1 LED2.1
NetLED3_1: LED3.1 R12.1 | length 2
  Top Layer w0.3: LED3.1 R12.1
NetLED4_2: LED4.2 R15.2 | length 2.3
  Top Layer w0.3: R15.2 80.645,45.72 LED4.2
NETLIGHT: R16.2 U4.52 | length 34.5
  Top Layer w0.2: U4.52 63.438,31.053 70.097,37.712 70.097,47.237 73.152,50.292 R16.2
NetQ1_2: Q1.2 R16.1 R17.1 | length 7
  Top Layer w0.3: Q1.2 75.438,47.879 R17.1 R16.1
NetQ1_3: Q1.3 R15.1 | length 2.6
  Top Layer w0.3: Q1.3 80.264,43.561 R15.1
NetQ2_2: Q2.2 R14.1 R18.1 | length 6.8
  Top Layer w0.3: Q2.2 51.054,30.924 51.562,31.432 R18.1 R14.1
NetQ2_3: Q2.3 R13.1 | length 3.3
  Top Layer w0.3: Q2.3 53.594,27.364 54.23,28 54.289,28 54.76,28.471 55.649,28.471 R13.1
NetR6_1: R6.1 U3.44 | length 6.8
  Top Layer w0.3: U3.44 43.446,53.86 45.085,55.499 R6.1
NetR8_1: R8.1 U4.9 | length 56.5
  Top Layer w0.2: R8.1 59.724,49.31 66.006,49.31 66.657,48.659 66.657,39.479 65.074,37.896 65.074,37.878 64.77,37.573 v1(64.77,37.465) ; v1(64.755,30.48) 64.77,30.465 64.77,27.94 75.288,17.422 75.288,4.914 U4.9
  Bottom Layer w0.2: v1(64.755,30.48) 64.762,30.487 64.762,37.457 v1(64.77,37.465)
NetR9_1: R9.1 U4.10 | length 53.3
  Top Layer w0.2: R9.1 65.659,46.99 66.04,46.609 66.04,39.878 v1(65.405,39.243) ; v1(65.405,31.242) 65.405,28.719 76.288,17.836 76.288,4.914 U4.10
  Bottom Layer w0.2: v1(65.405,31.242) v1(65.405,39.243)
NetR11_2: R11.2 U4.16 | length 33.7
  Top Layer w0.2: R11.2 84.436,35.433 84.553,35.316 84.553,21.538 82.438,19.423 U4.16
NRST: C16.1 R10.1 SW1.1 U3.7 | length 20.6
  Top Layer w0.2: C16.1 R10.1 40.767,34.419 43.051,36.703 SW1.1 43.307,36.759 v1(43.307,37.719) ; U3.7 40.063,47.295 43.231,47.295 v1(43.307,47.371)
  Bottom Layer w0.2: v1(43.307,37.719) v1(43.307,47.371)
OSC32_IN: C14.2 U3.3 X2.2 | length 18
  Top Layer w0.3: X2.2 31.58,58.082 32.85,58.082 35.622,55.31 35.622,50.484 36.858,49.248 U3.3
  Top Layer w0.6: X2.2 C14.2
OSC32_OUT: C15.2 U3.4 X2.1 | length 15.7
  Top Layer w0.3: X2.1 34.798,52.324 34.798,50.165 36.215,48.748 U3.4
  Top Layer w0.6: C15.2 X2.1
OSC_IN: C10.2 U3.5 X1.2 | length 13.2
  Top Layer w0.3: C10.2 29.792,49.149 30.427,48.514 X1.2 31.127,48.248 U3.5
OSC_OUT: C11.2 U3.6 X1.1 | length 14.9
  Top Layer w0.3: C11.2 29.665,42.672 30.427,43.434 X1.1 35.175,47.748 U3.6
PWRKEY: R13.2 U4.1 | length 31.8
  Top Layer w0.2: R13.2 v1(57.531,26.67)
  Top Layer w0.3: v1(65.021,26.673) 67.438,24.256 U4.1
  Bottom Layer w0.2: v1(57.531,26.67) 57.532,26.671 65.02,26.671 v1(65.021,26.673)
SIM_CLK: "SIM Holder1.3" D5.4 U4.32 | length 61
  Top Layer w0.2: U4.32 89.139,22.764 v1(89.146,22.757) ; D5.4 87.847,51.04 87.847,50.663 87.964,50.546 88.86,50.546 89.535,49.871 89.535,43.561 93.599,39.497 v1(93.599,22.733)
  Top Layer w0.3: 72.412,65.278 77.47,65.278 87.772,54.976 D5.4
  Bottom Layer w0.2: v1(89.146,22.757) 89.158,22.745 93.587,22.745 v1(93.599,22.733)
SIM_DATA: "SIM Holder1.6" C17.1 D5.1 U4.31 | length 57.6
  Top Layer w0.2: v1(85.598,49.276) 85.598,41.842 91.854,35.586 v1@91.854,21.717 ; U4.31 89.139,21.764 v1(89.146,21.756)
  Top Layer w0.3: v1(85.598,49.276) 85.629,49.245 86.447,49.245 86.472,49.22 D5.1
  Bottom Layer w0.2: v1(89.146,21.756) 89.166,21.737 91.801,21.737 v1(91.821,21.717)
  Bottom Layer w0.3: v1(85.598,49.276) 85.598,61.849 87.503,63.754 C17.1 92.788,63.803 v1(92.788,65.278)
SIM_nRST: R11.1 SW2.1 U3.32 | length 60.3
  Top Layer w0.2: U3.32 50.558,48.248 50.927,47.879 54.483,47.879 55.245,48.641 55.245,50.927 58.166,53.848 v1(65.532,53.848) ; R11.1 80.01,35.496 82.677,38.163 82.677,52.959 v1(81.788,53.848)
  Top Layer w0.3: SW2.1 79.883,35.306 R11.1
  Bottom Layer w0.2: v1(65.532,53.848) v1(81.788,53.848)
SIM_RST: "SIM Holder1.2" D5.5 U4.33 | length 57
  Top Layer w0.2: D5.5 87.122,50.244 87.239,50.126 88.685,50.126 89.135,49.676 89.135,43.307 92.71,39.732 v1(92.71,23.749) ; U4.33 87.445,23.757 89.146,23.757 v1(89.154,23.749)
  Top Layer w0.3: 72.412,62.738 78.359,62.738 87.122,53.975 D5.5
  Bottom Layer w0.2: v1(89.154,23.749) v1(92.71,23.749)
SIM_RXD: P5.3 R8.2 U3.31 | length 17.9
  Top Layer w0.2: U3.31 50.121,47.748 50.498,47.371 55.499,47.371 56.678,48.55 56.742,48.55 57.277,49.085 57.277,49.212 57.812,49.748 57.876,49.748 58.928,50.8 P5.3
SIM_TXD: P5.2 R9.2 U3.30 | length 17
  Top Layer w0.2: U3.30 49.653,47.248 49.93,46.971 55.665,46.971 55.684,46.99 R9.2 57.277,47.053 57.812,47.589 58.404,47.589 58.966,48.151 64.534,48.151 P5.2
SIM_VDD: "SIM Holder1.1" C18.1 D5.6 U4.30 | length 56
  Top Layer w0.3: v1(72.285,60.071) v1@72.348,60.071 ; v1@72.412,60.198 78.867,60.198 86.472,52.593 D5.6 86.397,51.04 86.397,50.71 85.979,50.292 85.305,50.292 84.803,49.79 84.803,41.513 91.059,35.257 91.059,21.737 90.079,20.757 v1(89.146,20.757) 89.139,20.764 U4.30
  Top Layer w0.642: v1(72.285,60.071) v1@72.412,60.198
SSD1306_SCL: P7.3 P8.3 R19.2 U3.21 | length 53.6
  Top Layer w0.2: P8.3 8.812,27.862 32.463,27.862 R19.2 P7.3 35.306,30.734 43.561,30.734 45.446,32.619 U3.21
SSD1306_SDA: P7.4 P8.4 R20.2 U3.22 | length 55.8
  Top Layer w0.2: P8.4 27.686,26.67 32.131,22.225 34.544,22.225 35.179,22.86 35.179,25.4 35.723,25.944 35.723,26.008 36.258,26.543 R20.2 P7.4 37.346,30.234 43.768,30.234 45.946,32.412 U3.22
STATUS: R12.2 U4.66 | length 7.9
  Top Layer w0.3: R12.2 56.769,8.064 57.254,8.55 57.318,8.55 59.532,10.764 U4.66
STM_STATUS: R7.2 U3.25 | length 4.6
  Top Layer w0.3: U3.25 50.698,44.748 50.781,44.831 R7.2
SWCLK: P3.3 U3.37 | length 15.5
  Top Layer w0.2: U3.37 46.946,52.661 57.15,62.865 P3.3
SWDIO: P3.2 U3.34 | length 20
  Top Layer w0.2: U3.34 48.329,49.295 47.479,49.295 47.117,49.657 47.117,50.355 59.627,62.865 P3.2
VGSM: D2.2 D3.C D4.C LED4.1 U4.55 U4.56 U4.57 | length 88.8
  Top Layer w1.5: D2.2 51.025,72.39 51.07,72.345 D4.C D3.C 63.164,72.345 65.786,69.723 65.786,56.251 66.665,55.372 68.834,55.372 ; 60.706,20.574 60.706,30.394 68.834,38.522 68.834,55.372 ; LED4.1 80.645,52.705 77.978,55.372 68.834,55.372
Vin: C4.1 C5.1 F1.2 U1.1 | length 19.9
  Top Layer w1: F1.2@27.686,95.936 32.766,95.936 C4.1@38.862,95.936 ; C4.1 38.995,95.758 C5.1 ; C5.1@43.78,95.729 U1.1
pads on no net: "SIM Holder1.5" D5.3 U2.4 U3.2 U3.10 U3.11 U3.14 U3.26 U3.27 U3.28 U3.33 U3.38 U3.45 U3.46 U4.2 U4.3 U4.4 U4.5 U4.6 U4.7 U4.8 U4.11 U4.12 U4.13 U4.14 U4.15 U4.19 U4.20 U4.21 U4.22 U4.23 U4.24 U4.25 U4.26 U4.27 U4.28 U4.34 U4.35 U4.36 U4.37 U4.38 U4.40 U4.41 U4.42 U4.43 U4.44 U4.47 U4.48 U4.49 U4.50 U4.51 U4.67 U4.68

## Polygon pours and split planes (outlines as drawn)
GND_MCU on Bottom Layer "NONET_L-01_P-001" (solid, remove dead copper, pour order 2): 0,24.892 0,67.945 32.131,67.945 38.989,74.803 67.564,74.803 67.564,44.831 65.532,42.799 63.119,42.799 60.833,40.513 60.833,35.052 59.309,33.528 48.006,33.528 39.37,24.892
GND on Bottom Layer "NONET_L-01_P-001" (solid, remove dead copper, pour order 0): 0,100 100,100 100,74.803 38.989,74.803 32.131,67.945 0,67.945
GND_SIM on Bottom Layer "NONET_L-01_P-001" (solid, remove dead copper, pour order 3): 67.564,74.803 100,74.803 100,0 0,0 0,24.892 39.37,24.892 48.006,33.528 59.309,33.528 60.833,35.052 60.833,40.513 63.119,42.799 65.532,42.799 67.564,44.831
GND_SIM on Top Layer "NONET_L-01_P-001" (solid, remove dead copper, pour order 4): 67.564,74.803 100,74.803 100,0 0,0 0,24.892 39.37,24.892 48.006,33.528 59.309,33.528 60.833,35.052 60.833,40.513 63.119,42.799 65.532,42.799 67.564,44.831

## Keep-outs
Keep-Out Layer:
  the board outline again, w0.1

## Other copper
Top Layer:
  region net VGSM: 63.373,22.098 61.722,22.098 61.214,22.606 60.833,22.606 59.944,21.717 59.944,20.066 60.579,19.431 63.373,19.431

## Silkscreen, mask and mechanical layers (free items; w line width, h text height)
Top Overlay:
  lines w0.254: 18.796,30.602 18.796,3.302 46.101,3.302 46.101,30.734 18.796,30.734 ; 18.862,29.21 28.702,29.21 28.702,30.71 ; 0.254,31.242 18.2,31.242 18.2,59.182 0.254,59.182 0.254,31.242
  text "GND" at 28.192,87.033 h1.5 r270
  text "5V" at 28.192,84.433 h1.5 r270
  text "3V3" at 30.628,71.109 h1.5 r90
  text "GND" at 30.575,68.509 h1.5 r90
  text "3V3" at 54.128,66.794 h1.5 r270
  text "CLK" at 56.728,66.794 h1.5 r270
  text "DIO" at 59.328,66.794 h1.5 r270
  text "GND" at 61.981,66.794 h1.5 r270
  text "RX1" at 34.525,66.786 h1.5 r270
  text "TX1" at 37.125,66.786 h1.5 r270
  text "3V3" at 39.742,66.786 h1.5 r270
  text "GND" at 42.395,66.786 h1.5 r270
  text "PB5" at 45.92,66.779 h1.5 r270
  text "PB4" at 48.504,66.779 h1.5 r270
  text "PB3" at 51.12,66.779 h1.5 r270
  text "GND" at 27.615,62.389 h1.5
  text "3V3" at 30.215,62.336 h1.5
  text "SIM_RXD" at 66.691,50.646 h1.5
  text "SIM_TXD" at 66.691,47.992 h1.5
  text "SX1278" at 4.882,45.974 h1.5
  text "GND" at 66.691,45.143 h1.5
  text "RST_MCU" at 36.322,38.874 h1.5
  text "RST_SIM" at 70.104,37.858 h1.5
  text "PWR_SIM" at 49.149,36.969 h1.5
  text "GND" at 21.462,35.136 h1.5 r270
  text "3V3" at 24.062,35.136 h1.5 r270
  text "TX2" at 26.645,35.136 h1.5 r270
  text "RX2" at 29.299,35.136 h1.5 r270
  text "GND" at 2.916,22.487 h1.5 r90
  text "3V3" at 5.569,22.487 h1.5 r90
  text "SCL" at 8.169,22.487 h1.5 r90
  text "SDA" at 10.769,22.487 h1.5 r90
  text "SSD1306" at 27.704,15.908 h1.5

## Text inside footprints (layer, text, board x,y; h text height)
P9: Top Overlay "8" at 14.605,34.925 h1.5; Top Overlay "4" at 14.605,32.385 h1.5; Top Overlay "1" at 3.429,32.385 h1.5; Top Overlay "5" at 2.921,34.925 h1.5
"SIM Holder1": Top Overlay "OPEN" at 88.912,63.949 h1.5 r90; Top Overlay "LOCK" at 75.412,68.349 h1.5
U1: Top Overlay "1" at 47.676,97.355 h1.5 r270